# EAGLE board Thetis_RevG1_PCB (EAGLE 9.7.0)
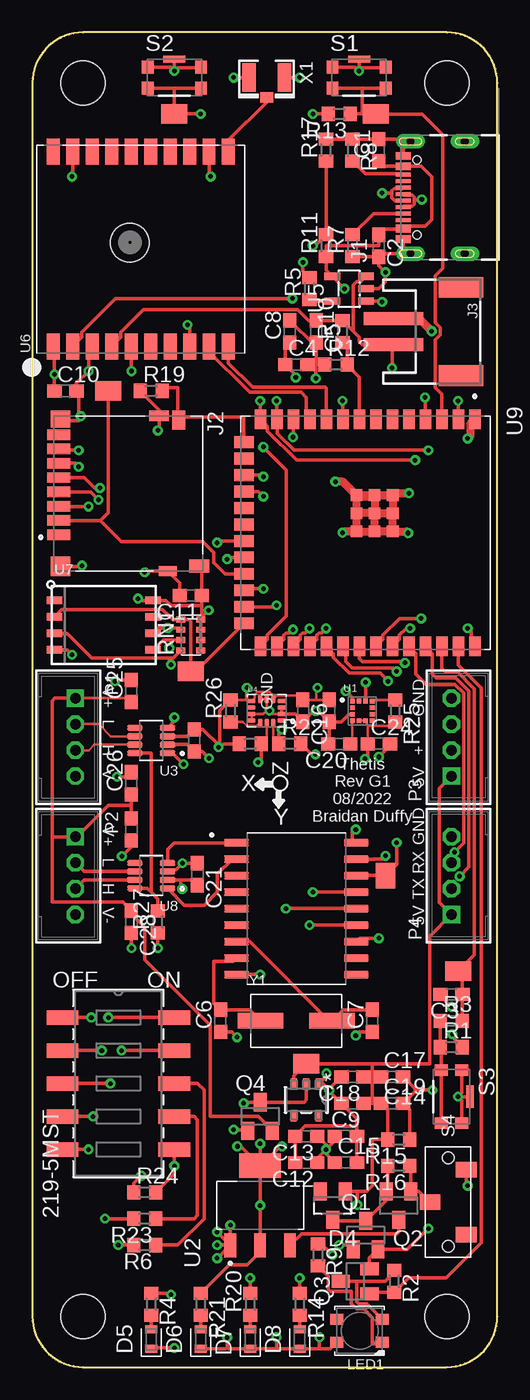
[diagram p0: board, top side]
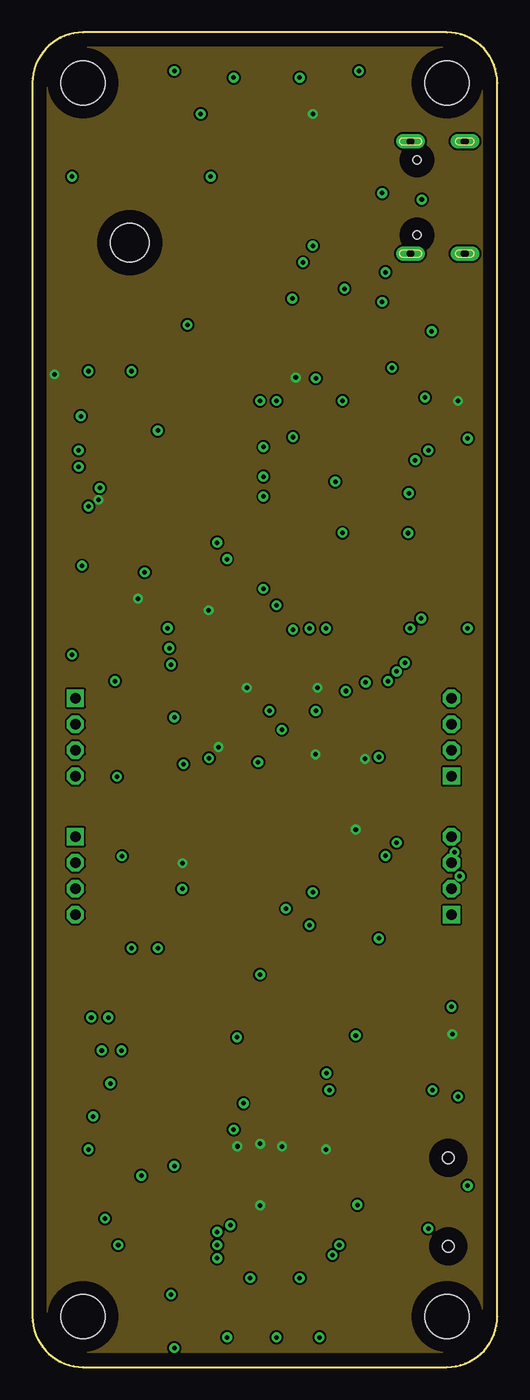
[diagram p1: board, inner layer PowerPlane]
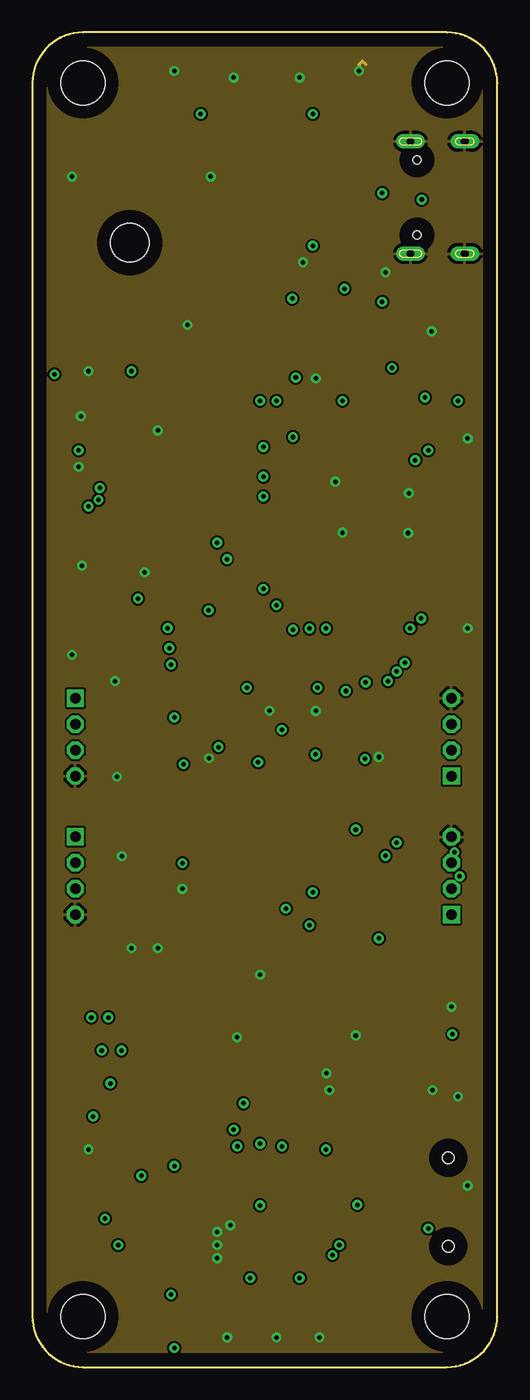
[diagram p2: board, inner layer GNDPlane]
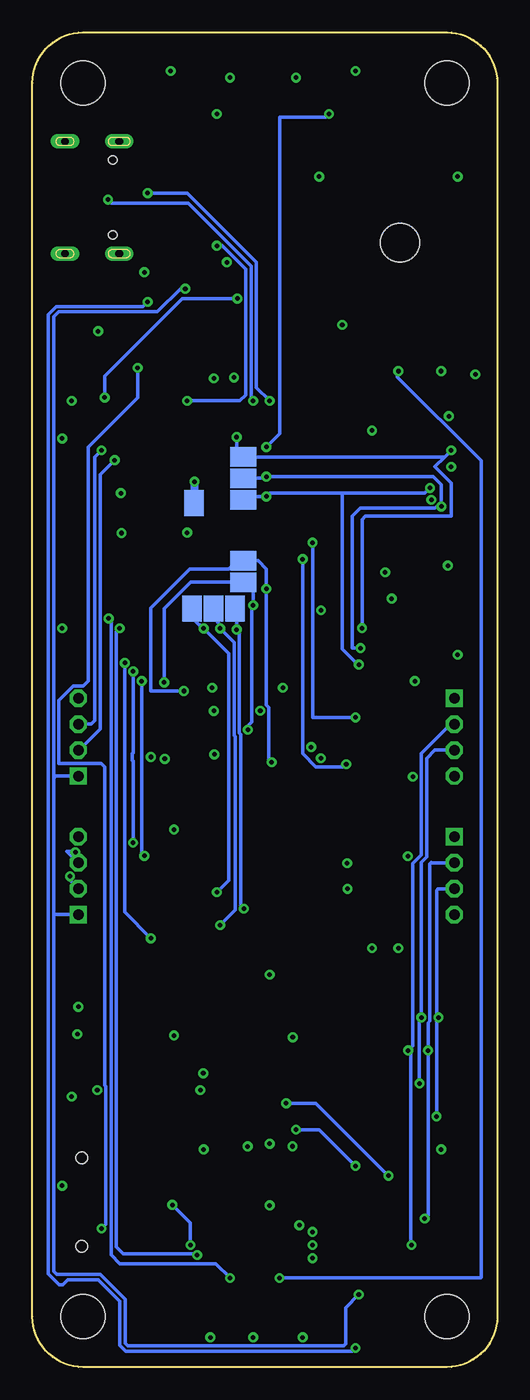
[diagram p3: board, bottom side, seen from below]

Size 35.79 x 102.79 mm. Coordinates in mm from the lower left corner, seen from the top.
Outline: 0,98.91 0,3.89 arc90 3.89,0 31.9,0 arc90 35.79,3.89 35.79,98.91 arc90 31.9,102.79 3.89,102.79 arc90 0,98.91
Copper layers (1+2*15+16): Top 0.035mm / dielectric 1.5mm / PowerPlane 0.035mm / dielectric 0.15mm / GNDPlane 0.035mm / dielectric 0.2mm / Bottom 0.035mm
Design rules "default *": minimum track width 6mil, minimum drill 0.35mm, track to track 6mil, track to pad 6mil, pad to pad 6mil, via to via 6mil, smd to smd 6mil, copper to edge 40mil, drill to drill 6mil, minimum pad ring 10mil, minimum via ring 8mil, stop-mask expansion 4mil, vias tented up to drill 0mil, thermal gap 10mil
Net classes: 0 default: width 0.178 mm
Holes 3.4 mm at 3.89,3.89 31.9,3.89 3.89,98.91 31.9,98.91
tKeepout: area 28.7,0.7 to 35.1,7.1; area 1,0.7 to 7.3,7.1; area 0.7,95.7 to 7.1,102.1; area 28.7,95.7 to 35.1,102.1

## Footprints (pad centres in the part's own frame; a part is rotated, then mirrored left to right if it is on the bottom)
C0603 = smd 1.1 x 1: 1 -0.85,0; 2 0.85,0
SOT23 = smd 1 x 1.4: 1 -0.95,-1.1; 2 0.95,-1.1; 3 0,1.1
LEDC1608X65N_RND-G = smd 0.612 x 0.912: A 0.75,0; C -0.75,0
LEDC1608X35N_FLAT-Y = smd 0.612 x 0.912: A 0.75,0; C -0.75,0
GCT_USB4105-GF-A = smd 0.6 x 1.15: A1_B12 -3.2,4.755; A4_B9 -2.4,4.755; B1_A12 3.2,4.755; B4_A9 2.4,4.755 | smd 0.3 x 1.15: A5 -1.25,4.755; A6 -0.25,4.755; A7 0.25,4.755; A8 1.25,4.755; B5 1.75,4.755; B6 0.75,4.755; B7 -0.75,4.755; B8 -1.75,4.755 | drill 0.6 pad 1.05 long: S1 -4.32,4.18; S4 4.32,4.18 | drill 0.6 pad 1 long: S2 -4.32,0; S3 4.32,0 | hole 0.65: 2.89,3.68; -2.89,3.68
HRS_DM3D-SF = smd 0.8 x 1.75: 1 3.2,0; 2 2.1,0; 3 1,0; 4 -0.1,0; 5 -1.2,0; 6 -2.3,0; 7 -3.4,0; 8 -4.5,0 | smd 1.3 x 1.5: S1 -5.7,0.125 | smd 1.5 x 1.5: S2 5.65,0.125 | smd 0.8 x 1.5: S3 -5.95,7.725 | smd 0.8 x 1.4: S4 6,8.375 | smd 1 x 1.55: SW-A 5.6,10.8 | smd 1.45 x 1: SW-B -5.625,9.225
JSTPH2 = smd 1 x 4.6: 1 -1,-3.7; 2 1,-3.7 | smd 1.6 x 3.4: NC1 -3.4,1.5; NC2 3.4,1.5
LED3535 = smd 1 x 0.85: 1 -1.75,0.875; 2 -1.75,-0.875; 3 1.75,-0.875; 4 1.75,0.875
B4B-PH-K = drill 0.813 square: 1 -3,0 | drill 0.813 octagon: 2 -1,0; 3 1,0; 4 3,0
R0603 = smd 1 x 1.1: 1 -0.85,0; 2 0.85,0
EXBV8V = smd 0.45 x 0.7: 1 -1.2,-0.775; 2 -0.4,-0.775; 3 0.4,-0.775; 4 1.2,-0.775; 5 1.2,0.775; 6 0.4,0.775; 7 -0.4,0.775; 8 -1.2,0.775
SW_KMR221GLFS = smd 0.9 x 1: 1 -2.05,0.8; 2 -2.05,-0.8; 3 2.05,-0.8; 4 2.05,0.8 | smd 1.7 x 0.55: 5 0,1.425
CL-SB-12A = smd 1.2 x 1.6: 1 -2.5,-1.4; 2 0,1.4; 3 2.5,-1.4 | hole 0.9: -3.4,0; 3.4,0
SW5_219SMT = smd 2.438 x 1.118: 1 -4.305,5.08; 2 -4.305,2.54; 3 -4.305,0; 4 -4.305,-2.54; 5 -4.305,-5.08; 6 4.305,-5.08; 7 4.305,-2.54; 8 4.305,0; 9 4.305,2.54; 10 4.305,5.08
PAD-1.5X2.0 = smd 1.5 x 2: P$1 0,0
XDCR_LIS3MDLTR = smd 0.375 x 0.35: 1 -0.762,0.75; 2 -0.762,0.25; 3 -0.762,-0.25; 4 -0.762,-0.75; 7 0.762,-0.75; 8 0.762,-0.25; 9 0.762,0.25; 10 0.762,0.75 | smd 0.35 x 0.375: 5 -0.25,-0.762; 6 0.25,-0.762; 11 0.25,0.762; 12 -0.25,0.762
SOT230P700X180-4N = smd 1.86 x 0.9: 1 -3.075,2.3; 2 -3.075,0; 3 -3.075,-2.3 | smd 1.86 x 3.19: 4 3.075,0
SOT65P280X145-8N = smd 1.21 x 0.48: 1 -1.255,0.975; 2 -1.255,0.325; 3 -1.255,-0.325; 4 -1.255,-0.975; 5 1.255,-0.975; 6 1.255,-0.325; 7 1.255,0.325; 8 1.255,0.975
PQFN50P300X250X97-14N = smd 0.61 x 0.35: 1 -1.16,0.75; 2 -1.16,0.25; 3 -1.16,-0.25; 4 -1.16,-0.75; 8 1.16,-0.75; 9 1.16,-0.25; 10 1.16,0.25; 11 1.16,0.75 | smd 0.35 x 0.61: 5 -0.5,-0.91; 6 0,-0.91; 7 0.5,-0.91; 12 0.5,0.91; 13 0,0.91; 14 -0.5,0.91
SOT23-5L = smd 0.55 x 1.2: 1 -0.95,-1.3; 2 0,-1.3; 3 0.95,-1.3; 4 0.95,1.3; 5 -0.95,1.3
FGPMMOPA6H = smd 2 x 1: P$1 -7.5,6.75; P$2 -7.5,5.25; P$3 -7.5,3.75; P$4 -7.5,2.25; P$5 -7.5,0.75; P$6 -7.5,-0.75; P$7 -7.5,-2.25; P$8 -7.5,-3.75; P$9 -7.5,-5.25; P$10 -7.5,-6.75; P$11 7.5,-6.75; P$12 7.5,-5.25; P$13 7.5,-3.75; P$14 7.5,-2.25; P$15 7.5,-0.75; P$16 7.5,0.75; P$17 7.5,2.25; P$18 7.5,3.75; P$19 7.5,5.25; P$20 7.5,6.75 | hole 3: 0.5,0.85
LGA8_8X6 = smd 1.2 x 0.6: 1 -3.8,1.905; 2 -3.8,0.635; 3 -3.8,-0.635; 4 -3.8,-1.905; 5 3.8,-1.905; 6 3.8,-0.635; 7 3.8,0.635; 8 3.8,1.905
XCVR_ESP32-S2-SOLO-U-N4R2 = smd 1.5 x 0.9: 1 -8.75,8.41; 2 -8.75,7.14; 3 -8.75,5.87; 4 -8.75,4.6; 5 -8.75,3.33; 6 -8.75,2.06; 7 -8.75,0.79; 8 -8.75,-0.48; 9 -8.75,-1.75; 10 -8.75,-3.02; 11 -8.75,-4.29; 12 -8.75,-5.56; 13 -8.75,-6.83; 14 -8.75,-8.1; 27 8.75,-8.1; 28 8.75,-6.83; 29 8.75,-5.56; 30 8.75,-4.29; 31 8.75,-3.02; 32 8.75,-1.75; 33 8.75,-0.48; 34 8.75,0.79; 35 8.75,2.06; 36 8.75,3.33; 37 8.75,4.6; 38 8.75,5.87; 39 8.75,7.14; 40 8.75,8.41 | smd 0.9 x 1.5: 15 -6.985,-9.35; 16 -5.715,-9.35; 17 -4.445,-9.35; 18 -3.175,-9.35; 19 -1.905,-9.35; 20 -0.635,-9.35; 21 0.635,-9.35; 22 1.905,-9.35; 23 3.175,-9.35; 24 4.445,-9.35; 25 5.715,-9.35; 26 6.985,-9.35 | smd 0.9 x 0.9: 41_1 -2.9,2.09; 41_2 -1.5,2.09; 41_3 -0.1,2.09; 41_4 -2.9,0.69; 41_5 -1.5,0.69; 41_6 -0.1,0.69; 41_7 -2.9,-0.71; 41_8 -1.5,-0.71; 41_9 -0.1,-0.71
SOT_50WR-7_DIO-L = smd 0.8 x 0.457: 1 -1.251,0.95; 2 -1.251,0; 3 -1.251,-0.95; 4 1.251,-0.95; 5 1.251,0.95
SOIC127P1030X265-18N = smd 1.91 x 0.6: 1 -4.61,5.08; 2 -4.61,3.81; 3 -4.61,2.54; 4 -4.61,1.27; 5 -4.61,0; 6 -4.61,-1.27; 7 -4.61,-2.54; 8 -4.61,-3.81; 9 -4.61,-5.08; 10 4.61,-5.08; 11 4.61,-3.81; 12 4.61,-2.54; 13 4.61,-1.27; 14 4.61,0; 15 4.61,1.27; 16 4.61,2.54; 17 4.61,3.81; 18 4.61,5.08
U.FL = smd 2.2 x 1.05: 1 0,1.375; 2 0,-1.375 | smd 0.8 x 1: 3 1.525,0
XTAL_ECS-160-20-3X-TR = smd 3.5 x 1.2: 1 -2.75,0; 2 2.75,0

## Placement (x,y rotation side)
C1  10 uF  [C0603]  26.67,93.73 90 top
C2  10 uF  [C0603]  26.67,86.36 270 top
C3  1 uF  [C0603]  32.26,28.7 180 top
C4  0.1 uF  [C0603]  20.32,77.22 0 top
C5  10 uF  [C0603]  21.84,79.76 270 top
C6  22 pF  [C0603]  14.48,26.67 90 top
C7  22 pF  [C0603]  26.16,26.67 90 top
C8  0.1 uF  [C0603]  19.81,79.76 90 top
C9  1 uF  [C0603]  24.64,20.32 180 top
C10  1 uF  [C0603]  2.54,75.18 0 top
C11  1 uF  [C0603]  12.19,59.44 180 top
C12  1 uF  [C0603]  21.08,15.75 180 top
C13  1 uF  [C0603]  21.08,17.78 180 top
C14  1 uF  [C0603]  24.13,17.78 0 top
C15  1 uF  [C0603]  24.13,15.75 0 top
C16  0.1 uF  [C0603]  20.83,50.55 270 top
C17  1 uF  [C0603]  27.69,22.35 0 top
C18  1 uF  [C0603]  24.64,22.35 180 top
C19  1 uF  [C0603]  27.69,20.32 0 top
C20  0.1 uF  [C0603]  23.62,48.01 180 top
C21  0.1 uF  [C0603]  12.7,37.96 270 top
C22  0.1 uF  [C0603]  12.45,48.26 270 top
C23  0.1 uF  [C0603]  22.86,50.55 270 top
C24  0.1 uF  [C0603]  26.67,48.01 0 top
C25  1 uF  [C0603]  7.62,52.07 90 top
C26  1 uF  [C0603]  7.62,44.96 90 top
C27  1 uF  [C0603]  7.62,41.4 270 top
C28  1 uF  [C0603]  7.62,34.29 270 top
D4  BAT400  [SOT23]  23.11,12.45 180 top
D5  LED_GREEN  [LEDC1608X65N_RND-G]  9.14,2.15 90 top
D6  LED_GREEN  [LEDC1608X65N_RND-G]  12.95,2.15 90 top
D7  LED_YELLOW  [LEDC1608X35N_FLAT-Y]  16.76,2.15 90 top
D8  LED_GREEN  [LEDC1608X65N_RND-G]  20.57,2.15 90 top
J1  USB4105-GF-A  [GCT_USB4105-GF-A]  33.29,90.08 90 top
J2  DM3D-SF  [HRS_DM3D-SF]  2.03,67.31 270 top
J3  1S LiPo  [JSTPH2]  31.5,79.76 270 top
LED1  WS2812B3535  [LED3535]  25.19,2.79 180 top
P1  CAN0  [B4B-PH-K]  3.3,48.51 270 top
P2  CAN1  [B4B-PH-K]  3.3,37.85 270 top
P3  USB  [B4B-PH-K]  32.26,48.51 90 top
P4  UART  [B4B-PH-K]  32.26,37.85 90 top
Q1  AOSS21311C  [SOT23]  25.65,10.16 0 top
Q2  AOSS21311C  [SOT23]  28.19,12.45 180 top
Q3  AOSS21311C  [SOT23]  24.84,6.6 90 top
Q4  AOSS21311C  [SOT23]  17.53,19.3 0 top
R1  10k  [R0603]  32.26,24.64 0 top
R2  100k  [R0603]  27.85,6.6 270 top
R3  10k  [R0603]  32.26,26.67 0 top
R4  1k  [R0603]  9.14,4.83 270 top
R5  2k  [R0603]  21.34,83.06 90 top
R6  120  [R0603]  8.64,9.4 180 top
R7  5k1  [R0603]  24.64,86.36 90 top
R8  5k1  [R0603]  24.64,93.73 270 top
R9  480  [R0603]  21.98,8.64 270 top
R10  1M  [R0603]  23.88,79.76 90 top
R11  100k  [R0603]  22.61,86.36 90 top
R12  1M  [R0603]  23.37,77.22 0 top
R13  10k  [R0603]  23.62,96.52 180 top
R14  1k  [R0603]  20.57,4.83 270 top
R15  100k  [R0603]  28.19,17.53 180 top
R16  100k  [R0603]  28.19,15.49 180 top
R17  200k  [R0603]  22.61,93.73 90 top
R18  2.7k  [R0603]  16.76,48.01 180 top
R19  10k  [R0603]  9.14,75.18 0 top
R20  1k  [R0603]  16.76,4.83 90 top
R21  1k  [R0603]  12.95,4.83 270 top
R22  2.7k  [R0603]  19.81,48.01 0 top
R23  120  [R0603]  8.64,11.43 180 top
R24  100k  [R0603]  8.64,13.46 0 top
R25  10k  [R0603]  27.94,50.55 270 top
R26  10k  [R0603]  15.24,50.55 90 top
R27  10k  [R0603]  9.65,34.29 90 top
RN1  10k  [EXBV8V]  12.19,56.39 90 top
S1  KMR221GLFS  [SW_KMR221GLFS]  25.15,99.31 0 top
S2  KMR221GLFS  [SW_KMR221GLFS]  10.92,99.31 0 top
S3  KMR221GLFS  [SW_KMR221GLFS]  32.26,20.83 270 top
S4  CL-SB-12X  [CL-SB-12A]  32,12.7 90 top
SW1  219-5MST  [SW5_219SMT]  6.62,21.84 0 top
TP7  [PAD-1.5X2.0]  19.56,60.45 90 bottom
TP8  [PAD-1.5X2.0]  19.56,62.1 90 bottom
TP9  [PAD-1.5X2.0]  19.56,68.45 90 bottom
TP10  [PAD-1.5X2.0]  19.56,66.8 90 bottom
TP11  [PAD-1.5X2.0]  19.56,70.11 90 bottom
TP12  [PAD-1.5X2.0]  5.84,75.18 90 top
TP14  [PAD-1.5X2.0]  23.37,66.55 0 bottom
TP18  [PAD-1.5X2.0]  12.19,53.59 90 top
TP19  [PAD-1.5X2.0]  10.92,96.52 90 top
TP20  [PAD-1.5X2.0]  26.42,96.52 90 top
TP21  [PAD-1.5X2.0]  27.18,37.85 180 top
TP22  [PAD-1.5X2.0]  23.5,58.42 0 bottom
TP23  [PAD-1.5X2.0]  20.19,58.42 0 bottom
TP24  [PAD-1.5X2.0]  21.84,58.42 0 bottom
TP27  [PAD-1.5X2.0]  21.08,23.37 270 top
TP28  [PAD-1.5X2.0]  32.77,30.48 270 top
U1  LIS3MDLTR  [XDCR_LIS3MDLTR]  25.4,50.55 0 top
U2  AZ1117H-3.3TRE1  [SOT230P700X180-4N]  17.53,12.45 90 top
U3  MAX3051EKA  [SOT65P280X145-8N]  9.14,48.26 180 top
U4  LSM6DSO32TR  [PQFN50P300X250X97-14N]  18.03,50.55 180 top
U5  MCP73831/OT  [SOT23-5L]  24.38,83.06 90 top
U6  [FGPMMOPA6H]  8.34,86.11 90 top
U7  [LGA8_8X6]  5.49,57.15 0 top
U8  MAX3051EKA  [SOT65P280X145-8N]  9.14,37.85 180 top
U9  ESP32-S2-SOLO-U-N4R2  [XCVR_ESP32-S2-SOLO-U-N4R2]  25.65,64.26 270 top
U10  AP7380  [SOT_50WR-7_DIO-L]  21.08,20.57 270 top
U11  MCP2515-I/SO  [SOIC127P1030X265-18N]  20.32,35.31 0 top
X1  [U.FL]  18.03,99.31 270 top
Y1  16 MHz  [XTAL_ECS-160-20-3X-TR]  20.32,26.67 0 top

## Library data of the parts
C1-C28 = rcl; SPICEPREFIX: C
D4 = diode
D5 D6 D8 = LED; CATEGORY: LED; COLOR: GREEN; DESCRIPTION: CHIP LED ROUND; SUB-CATEGORY: CHIP; TYPE: ROUND_TOP
D7 = LED; CATEGORY: LED; COLOR: YELLOW; DESCRIPTION: CHIP LED FLAT; SUB-CATEGORY: CHIP; TYPE: FLAT_TOP
J1 = USB4105-GF-A; AVAILABILITY: In Stock; DESCRIPTION: USB-C (USB TYPE-C) USB 2.0 Receptacle Connector 24 (16+8 Dummy) Position Surface Mount, Right Angle; Through Hole; MF: GCT; MP: USB4105-GF-A; PACKAGE: None; PRICE: None; PURCHASE-URL: https://pricing.snapeda.com/search/part/USB4105-GF-A/?ref=eda
J2 = UTL-Lib; MANUFACTURER: Hirose; MAXIMUM_PACKAGE_HEIGHT: 1.55mm; PARTREV: 2017.1; STANDARD: Manufacturer Recommendations
J3 LED1 U7 U11 = UTL-Lib
P1-P4 = con-jst-ph
Q1-Q4 = Transistor; CATEGORY: Transistor; DESCRIPTION: MOSFET P-CH 50V 130MA SOT-23; DRAIN_CURRENT: 130mA; MANUFACTURER: ON Semiconductor; MPN: BSS84; OPERATING_TEMP: -55°C ~ 150°C; PART_STATUS: Active; ROHS_COMPLIANT: Yes; SUB-CATEGORY: MOSFET; THERMALLOSS: 360mW; TYPE: P-Channel
R1-R27 = rcl; SPICEPREFIX: R
RN1 = resistor-dil-Poseidon-Edit; OC_FARNELL: unknown; OC_NEWARK: unknown
S1-S3 = KMR221GLFS; MANUFACTURER: CnK
S4 = switches; DIGIKEY: 563-1314-1-ND
SW1 = UTL-Lib; COPYRIGHT: Copyright (C) 2022 Ultra Librarian. All rights reserved.; DIGI-KEY_PART_NUMBER_1: CT2195MST-ND; MANUFACTURER_PART_NUMBER: 219-5MST; MFR_NAME: CTS Components
TP7-TP12 TP14 TP18-TP24 TP27 TP28 = microbuilder
U1 = UTL-Lib; AVAILABILITY: Unavailable; DESCRIPTION: LIS3MDL Series 3 Axis ±2/±8/±12/±16 g 3.6V High Performance Magnetometer LGA-12; MAXIMUM_PACKAGE_HEIGHT: 1mm; MF: STMicroelectronics; MP: LIS3MDLTR; PACKAGE: VFLGA-12 STMicroelectronics; PARTREV: 6; PRICE: None; STANDARD: Manufacturer Recommendation
U2 = AZ1117EH-5.0TRG1; ARROW_ELECTRONICS-PURCHASE-URL: https://snapeda.com/shop?store=Arrow+Electronics&id=482930; AVAILABILITY: Good; DESCRIPTION: Linear Voltage Regulator IC 1 Output 1A SOT-223; DIGIKEY-PURCHASE-URL: https://snapeda.com/shop?store=DigiKey&id=482930; MF: Diodes Inc.; MOUSER-PURCHASE-URL: https://snapeda.com/shop?store=Mouser&id=482930; MP: AZ1117EH-5.0TRG1; PACKAGE: SOT-223 Diodes Inc.; PRICE: None
U3 U8 = UTL-Lib; DESCRIPTION: 1/1 Transceiver Half CANbus SOT-23-8; DIGI-KEY_PART_NUMBER: MAX3051EKA+TTR-ND; MF: Maxim Integrated; MP: MAX3051EKA+T; PACKAGE: SOT-23-8 Maxim; PURCHASE-URL: https://pricing.snapeda.com/search/part/MAX3051EKA+T/?ref=eda
U4 = UTL-Lib; MANUFACTURER: TDK Corporation; PARTREV: 0.4; STANDARD: IPC 7351B
U5 U6 X1 = adafruit - EVE Edit
U9 = UTL-Lib; MANUFACTURER: Espressif Systems; MAXIMUM_PACKAGE_HEIGHT: 3.35 mm; PARTREV: 1.4; SNAPEDA_PN: ESP32-S2-SOLO-U-N4R2; STANDARD: Manufacturer Recommendations
U10 = UTL-Lib; COPYRIGHT: Copyright (C) 2022 Ultra Librarian. All rights reserved.; DIGI-KEY_PART_NUMBER_1: AP7380-50WR-7DITR-ND; DIGI-KEY_PART_NUMBER_2: AP7380-50WR-7DICT-ND; DIGI-KEY_PART_NUMBER_3: AP7380-50WR-7DIDKR-ND; MANUFACTURER_PART_NUMBER: AP7380-50WR-7; MFR_NAME: Diodes Inc
Y1 = UTL-Lib; MANUFACTURER: ECS INC.; PARTREV: 2017; STANDARD: Manufacturer recommendations

## Nets
3.3V: C4.1 C8.1 C10.1 C11.1 C12.1 C13.1 C14.1 C15.1 C16.1 C21.1 C22.1 C23.1 C24.1 J2.4 J2.SW-A R1.2 R13.2 R18.2 R21.1 R22.2 R25.2 R26.2 RN1.1 RN1.2 RN1.3 RN1.4 U1.5 U1.6 U2.2 U2.4 U3.3 U4.5 U4.8 U6.P$1 U7.8 U8.3 U9.2 U11.18
!CAN_CS: TP21.P$1 U9.32 U11.16
!CAN_EN: R27.2 U3.8 U8.8
!CAN_INT: U9.33 U11.12
!CAN_RST: U9.31 U11.17
!EXT_PWR_EN: Q4.1 R24.2 SW1.6
!GPS_RST: U6.P$2 U9.4
!LOG_EN: C3.1 R3.2 TP28.P$1 U9.38
!NEO_EN: Q3.1 R2.2 U9.39
!RST: R13.1 S1.2 S1.3 TP20.P$1 U9.3
ACT_LED: R14.1 U9.34
BATT_MON: R10.1 R12.2 U9.8
BOOT: S2.2 S2.3 TP19.P$1 U9.27
CAN0_H: P1.3 SW1.3 SW1.10 U3.7
CAN0_L: P1.2 R6.2 SW1.9 U3.6
CAN0_RXD: U3.1 U9.22
CAN0_TXD: U3.4 U9.21
CAN1_H: P2.3 SW1.1 SW1.4 U8.7
CAN1_L: P2.2 R23.2 SW1.2 U8.6
CAN1_RXD: U8.1 U11.2
CAN1_TXD: U8.4 U11.1
CAN_MISO: TP22.P$1 U9.30 U11.15
CAN_MOSI: TP23.P$1 U9.28 U11.14
CAN_SCK: TP24.P$1 U9.29 U11.13
CC1: J1.A5 R7.2
CC2: J1.B5 R8.2
ESP_RX0: P4.3 U9.36
ESP_RX1: U6.P$9 U9.11
ESP_TX0: P4.2 U9.37
ESP_TX1: U6.P$10 U9.10
GND: C1.2 C2.2 C3.2 C4.2 C5.2 C6.1 C7.1 C8.2 C9.2 C10.2 C11.2 C12.2 C13.2 C14.2 C15.2 C16.2 C17.2 C18.2 C19.2 C20.2 C21.2 C22.2 C23.2 C24.2 C25.2 C26.2 C27.2 C28.2 D6.C D7.C D8.C J1.A1_B12 J1.B1_A12 J1.S1 J1.S2 J1.S3 J1.S4 J2.6 J2.S1 J2.S2 J2.S3 J2.S4 J3.1 LED1.4 P1.4 P2.4 P3.4 P4.4 R5.2 R7.1 R8.1 R12.1 R15.1 R17.2 R19.1 R27.1 S1.1 S1.4 S1.5 S2.1 S2.4 S2.5 S3.1 S3.4 S3.5 S4.3 SW1.5 TP14.P$1 U1.3 U2.1 U3.2 U4.2 U4.3 U4.6 U4.7 U4.10 U4.11 U5.2 U6.P$3 U6.P$8 U6.P$12 U6.P$19 U7.4 U8.2 U9.1 U9.40 U9.41_1 U9.41_2 U9.41_3 U9.41_4 U9.41_5 U9.41_6 U9.41_7 U9.41_8 U9.41_9 U10.1 U11.9 X1.1 X1.2
GPS_FIX: R20.2 U6.P$5
MISO: J2.7 RN1.6 TP11.P$1 U7.6 U9.12
MOSI: J2.3 RN1.7 TP9.P$1 U7.5 U9.17
N$1: Q2.1 R16.1 S4.2
N$2: D7.A R20.1
N$3: D8.A R14.2
N$4: R1.1 R3.1 S3.2 S3.3
N$5: LED1.2 Q3.3 R2.1
N$6: Q2.3 U2.3
N$7: C20.1 U1.4
N$8: LED1.1 R9.2
N$10: U6.P$11 X1.3
N$11: R6.1 SW1.8
N$12: R26.1 U4.12
N$13: D4.3 Q1.3 Q2.2 R16.2
N$14: R23.1 SW1.7
N$15: R25.1 U1.10
N$16: Q4.3 R24.1 U10.2
N$20: D5.A R4.2
N$21: D5.C U5.1
N$22: R5.1 U5.5
N$24: D6.A R21.2
NEO_DATA: R9.1 U9.35
OSC1: C6.2 U11.8 Y1.1
OSC2: C7.2 U11.7 Y1.2
SCK: J2.5 RN1.8 TP10.P$1 U7.3 U9.18
SCL: R18.1 TP8.P$1 U1.1 U4.13 U9.24
SD_CD: J2.SW-B R19.2 U9.15
SD_CS: J2.2 TP12.P$1 U9.23
SDA: R22.1 TP7.P$1 U1.11 U4.14 U9.25
USB_DN: J1.A7 J1.B7 P3.3 U9.13
USB_DP: J1.A6 J1.B6 P3.2 U9.14
USB_MON: R11.2 R17.1 U9.9
V_BATT: C5.1 J3.2 Q1.2 Q3.2 R10.2 U5.3 U6.P$4
V_USB: C1.1 C2.1 C9.1 C17.1 C18.1 C19.1 D4.1 J1.A4_B9 J1.B4_A9 P3.1 P4.1 Q1.1 R4.1 R11.1 R15.2 TP27.P$1 U5.4 U10.3
VIN: C25.1 C26.1 C27.1 C28.1 P1.1 P2.1 Q4.2
XTSD_CS: RN1.5 TP18.P$1 U7.2 U9.26

## Tracks (layer width: path | path; a pad name or v marks a point on that pad's centre or on a via)
3.3V  (via drill 0.35)
  Top 0.178: 21.84,51.4 C16.1 20.51,51.71 18.84,51.71 18.58,51.46 U4.5 18.45,51.54 18.45,51.81 18.26,52 17.31,52 17.12,51.81 17.12,51.54 U4.8 16.77,51.4 16.51,51.4 R26.2 | 21.84,51.4 C23.1 | C24.1 25.82,49.44 | 25.82,49.44 25.73,49.52 25.73,49.7 U1.6 U1.5 | 25.82,49.44 25.88,49.38 27.62,49.38 R25.2 | 21.84,51.4 21.84,51.92 21.95,52.02 v21.95,52.32
  Top 0.254: 13.04,58.66 C11.1 13.04,61.5 J2.SW-A | 13.04,58.66 13.04,57.66 RN1.4 RN1.3 RN1.2 | RN1.2 RN1.1 | v13.57,58.29 12.97,57.69 RN1.2 | v17.53,17.2 U2.4 | C12.1 21.93,16.09 v22.61,16.76 | C13.1 22.61,17.11 v22.61,16.76 | C14.1 23.28,17.44 v22.61,16.76 | C15.1 22.61,16.42 v22.61,16.76 | U2.4 17.62,15.52 19.1,16.99 v19.22,16.99 | U2.4 16.05,17 v15.77,17 | U2.4 v17.53,12.45 U2.2 17.78,9.12 16.54,7.87 15.15,7.87 R21.1 | R1.2 32.39,25.36 32.39,25.59 v32.33,25.64 | v24.89,41.4 24.64,41.4 24.64,40.68 U11.18 | C8.1 19.47,78.56 C4.1 20.27,76.41 v20.27,76.22 | C10.1 v1.69,76.45 1.69,78.51 U6.P$1 | R13.2 v21.59,96.52 | R22.2 21.42,47.24 21.73,47.24 v21.79,47.19 | R18.2 14.73,48.01 14.48,47.75 | 14.41,47.82 13.12,49.11 C22.1 11.92,48.59 U3.3 | 14.41,47.82 14.41,50.57 R26.2 | 14.41,47.82 14.48,47.75 | 16.51,51.4 v16.51,52.32 | C24.1 25.82,47.05 v25.6,46.84 | v8.13,59.18 8.25,59.05 U7.8 10.28,59.05 10.68,58.66 13.04,58.66 | U9.2 32.79,74.39 v32.77,74.42 | J2.4 4.47,67.41 v5.08,66.8 | U8.3 10.53,38.3 11.05,38.3 v11.55,38.81 C21.1 | 14.48,47.75 v14.33,47.75
  pour PowerPlane: -2.2,-5.25 38.52,-5.25 38.52,108.62 -2.2,108.62
!CAN_CS  (via drill 0.35)
  Top 0.254: U11.16 TP21.P$1 28.04,38.71 v28.04,40.39 | U9.32 24.13,55.29 24.13,54.36 24.64,53.85 27.31,53.85 27.32,53.84 27.78,53.84 v28.04,53.58
  Bottom 0.254: v28.04,40.39 28.04,46.67 28.09,46.72 28.09,47.26 28.04,47.31 v28.04,53.58
!CAN_EN
  Top 0.254: U8.8 8.85,36.87 9.14,36.58 | 9.14,36.58 9.65,36.07 R27.2 | U3.8 9.1,47.28 9.14,47.24 9.14,36.58
!CAN_INT  (via drill 0.35)
  Top 0.254: U9.33 25.17,54.58 25.4,54.36 28.55,54.36 v28.67,54.23 | v26.67,33.02 25.18,33.02 U11.12
  Bottom 0.254: v26.67,33.02 28.7,35.05 28.7,54.2 v28.67,54.23
!CAN_RST  (via drill 0.35)
  Top 0.254: U9.31 23.17,54.97 23.17,54.65 24.38,53.44 26.77,53.44 v27.38,52.83 | v27.18,39.38 26.93,39.12 26.31,39.12 26.3,39.12 U11.17
  Bottom 0.254: v27.38,52.83 27.38,39.58 v27.18,39.38
!EXT_PWR_EN  (via drill 0.35)
  Top 0.254: Q4.1 16.49,18.29 v15.49,18.29 | SW1.6 v10.92,15.49 10.92,14.9 R24.2
  Bottom 0.254: v15.49,18.29 13.72,18.29 v10.92,15.49
!GPS_RST  (via drill 0.35)
  Top 0.254: U6.P$2 3.81,79.33 3.81,79.72 6.39,82.3 v20.01,82.3 | v30.23,74.68 30.25,74.65 U9.4
  Bottom 0.254: v30.23,74.68 30.23,76.32 24.25,82.3 v20.01,82.3
!LOG_EN
  Top 0.254: U9.38 31.52,53.82 31.75,53.59 32.66,53.59 34.01,52.24 34.01,31.73 TP28.P$1 33.11,30.14 C3.1 R3.2
!NEO_EN
  Top 0.254: U9.39 32.79,54.07 34.57,52.3 34.57,9.57 31.86,6.86 28.96,6.86 R2.2 26.04,5.75 Q3.1
!RST
  Top 0.254: R13.1 25.4,96.52 | 25.4,96.52 TP20.P$1 26.43,96.5 30.01,96.5 31.58,94.93 31.58,84.64 31.02,84.07 31.02,80.43 31.39,80.06 31.39,79.51 31.02,79.14 31.02,75.44 31.52,74.93 U9.3 | S1.2 25.4,98.51 | 25.4,98.51 S1.3 | 25.4,96.52 25.4,98.51
ACT_LED  (via drill 0.35)
  Top 0.254: U9.34 26.98,56.05 26.98,56.38 28.27,57.66 v29.92,57.66 | v20.57,6.86 R14.1
  Bottom 0.254: v20.57,6.86 21.69,7.97 29.05,7.97 29.74,8.65 29.74,57.47 v29.92,57.66
BATT_MON
  Top 0.254: R10.1 24.22,78.56 R12.2 25.17,76.26 U9.8
BOOT  (via drill 0.35)
  Top 0.254: S2.3 10.92,98.51 | 10.92,98.51 S2.2 | 10.92,98.51 TP19.P$1 v12.95,96.52 | v17.78,70.87 19.56,69.09 19.56,57.84 18.09,56.38 18.09,56.05 U9.27
  Bottom 0.254: v12.95,96.52 13.21,96.27 16.76,96.27 16.76,71.88 v17.78,70.87
CAN0_H  (via drill 0.35)
  Top 0.178: U3.7 4.75,47.94 4.32,47.5 3.32,47.5 P1.3
  Top 0.254: v5.84,26.92 SW1.10 | SW1.3 v5.99,21.84
  Bottom 0.254: P1.3 4.81,47.51 5.44,46.89 5.44,39.28 5.84,38.88 v5.84,26.92 5.99,26.77 5.99,21.89 v5.99,21.84
CAN0_L  (via drill 0.35)
  Top 0.178: P1.2 5.1,49.51 6.02,48.59 U3.6
  Top 0.254: v6.86,24.38 SW1.9 | v6.6,9.4 R6.2
  Bottom 0.254: P1.2 3.57,49.51 5.84,47.24 5.84,39.45 6.5,38.8 6.5,24.74 v6.86,24.38 6.65,24.18 6.65,9.44 v6.6,9.4
CAN0_RXD  (via drill 0.35)
  Top 0.254: U9.22 15.11,62.36 v14.99,62.23 | U3.1 10.77,47.28 v11.63,46.43
  Bottom 0.254: v14.99,62.23 14.99,47.24 13.97,46.23 11.82,46.23 v11.63,46.43
CAN0_TXD  (via drill 0.35)
  Top 0.254: U9.21 14.35,63.63 v14.22,63.5 | U3.4 10.92,49.76 v10.92,50.04
  Bottom 0.254: v14.22,63.5 14.22,50.04 v10.92,50.04
CAN1_H  (via drill 0.35)
  Top 0.254: P2.3 3.98,37.52 U8.7 | SW1.1 v4.53,26.92 | v4.68,19.3 SW1.4
  Bottom 0.254: P2.3 3.32,36.83 4.57,36.83 4.68,36.73 4.68,26.92 | 4.68,26.92 v4.53,26.92 | 4.68,26.92 v4.68,19.3
CAN1_L  (via drill 0.35)
  Top 0.254: U8.6 3.98,38.17 P2.2 | v5.33,24.38 SW1.2 | R23.2 v5.59,11.43
  Bottom 0.254: P2.2 5.06,38.85 5.08,38.86 5.18,38.76 5.18,26.65 5.33,26.5 v5.33,24.38 5.33,11.68 v5.59,11.43
CAN1_RXD
  Top 0.254: U8.1 10.4,36.84 11.68,35.56 13.21,35.56 14.24,36.59 14.24,37.98 15.37,39.12 U11.2
CAN1_TXD
  Top 0.254: U8.4 10.4,39.86 10.92,40.39 U11.1
CAN_MISO  (via drill 0.35)
  Top 0.254: U11.15 v21.6,36.58 v21.59,36.57 | U9.30 21.9,56.05 21.9,56.38 22.07,56.54 22.26,56.54 v22.61,56.89
  Bottom 0.254: TP22.P$1 23.5,57.67 22.96,57.14 22.86,57.14 v22.61,56.89 20.68,54.96 20.68,37.48 v21.59,36.57
CAN_MOSI  (via drill 0.35)
  Top 0.254: U9.28 19.36,56.05 19.36,56.38 19.53,56.54 19.81,56.54 v20.07,56.79 | v19.51,35.31 U11.14
  Bottom 0.254: TP23.P$1 20.07,58.29 v20.07,56.79 19.86,56.59 19.86,48.82 19.76,48.72 19.76,35.55 v19.51,35.31
CAN_SCK  (via drill 0.35)
  Top 0.254: U11.13 v21.34,34.04 | U9.29 20.63,56.05 20.63,56.38 20.8,56.54 20.99,56.54 v21.34,56.89
  Bottom 0.254: TP24.P$1 21.84,57.67 21.34,57.16 v21.34,56.89 20.27,55.82 20.27,48.65 20.17,48.55 20.17,35.2 v21.34,34.04
CC1
  Top 0.254: R7.2 26.26,88.83 J1.A5
CC2
  Top 0.254: R8.2 25.61,91.9 28.46,91.9 J1.B5
ESP_RX0  (via drill 0.35)
  Top 0.254: U9.36 29.52,54.97 29.52,53.38 30.32,52.58 32.52,52.58 33.2,51.9 33.2,40.36 v32.49,39.66
  Bottom 0.254: P4.3 33.13,39.72 32.84,39.72 32.77,39.66 v32.49,39.66
ESP_RX1
  Top 0.254: U9.11 21.08,73.29 21.08,74.68 20.68,75.08 16.72,75.08 13.39,78.41 U6.P$9
ESP_TX0  (via drill 0.35)
  Top 0.254: U9.37 30.79,54.97 30.79,53.38 31.09,53.09 32.59,53.09 33.6,52.07 33.6,38.51 v32.9,37.8
  Bottom 0.254: v32.9,37.8 32.9,37.48 P4.2
ESP_TX1
  Top 0.254: U6.P$10 15.09,77.34 16.94,75.49 22.56,75.49 22.63,75.41 U9.10
GND  (via drill 0.35)
  Top 0.178: U4.7 U4.6 18.03,50.55 | U4.11 U4.10 17.78,50.3 18.03,50.55 | U4.2 18.28,50.3 18.03,50.55 | 18.03,50.55 v18.25,50.55
  Top 0.254: v22.86,21.34 22.37,21.82 U10.1 22.61,22.4 22.61,22.6 v22.64,22.63 | C18.2 22.86,21.42 v22.86,21.34 | v22.86,21.34 22.86,21.25 C9.2 24.98,19.13 24.98,18.54 | C17.2 29.46,21.42 29.46,21.34 | 29.46,21.34 29.46,21.25 C19.2 29.04,19.81 R15.1 | S3.5 v32.77,20.83 | S3.1 33.06,21.12 v32.77,20.83 | S3.4 33.06,20.54 v32.77,20.83 | D6.C 14.86,1.4 14.99,1.52 | 14.99,1.52 15.11,1.4 D7.C 18.67,1.4 18.8,1.52 | 18.8,1.52 18.92,1.4 D8.C 21.97,1.4 | 21.97,1.4 22.1,1.52 v22.1,2.28 | LED1.4 22.91,1.4 21.97,1.4 | 24.98,18.54 C14.2 C15.2 | U2.1 15.23,10.91 v15.24,10.92 | U2.1 14.22,10.37 v14.22,10.41 | U2.1 15.2,9.4 v14.22,9.4 | U2.1 15.21,9.37 v14.22,8.38 | S4.3 33.4,14.09 33.5,13.99 v33.5,13.97 | C3.2 31.41,28.6 v32.26,27.75 | C7.1 25.17,25.82 v24.89,25.54 | C6.1 15.33,25.82 v15.75,25.4 | U11.9 v17.53,30.23 | SW1.5 v4.32,16.76 | J2.S2 3.75,61.66 v3.81,61.72 | J2.6 3.29,69.61 v3.56,69.34 | J2.S1 2.27,72.9 3.56,72.9 3.56,73.41 | v9.65,72.14 9.76,72.24 J2.S3 9.76,73.72 R19.1 | C4.2 21.82,77.22 | 21.82,77.22 21.84,77.22 | 21.84,77.22 R12.1 | 21.82,77.22 v21.82,76.15 | C5.2 21.84,78.74 | 21.84,78.74 21.84,77.22 | C8.2 21.68,78.74 21.84,78.74 | U6.P$3 4.32,78.33 v4.32,76.71 3.39,75.78 C10.2 3.56,75.02 3.56,73.41 | S1.1 24.85,100.11 v25.15,99.82 | v25.15,99.82 S1.5 | S1.4 27.16,100.08 25.4,100.08 v25.15,99.82 | X1.2 v15.49,99.31 | X1.1 v20.57,99.31 | S2.1 10.63,100.11 v10.92,99.82 | S2.5 v10.92,99.82 | S2.4 12.93,100.08 11.18,100.08 v10.92,99.82 | J1.S4 28.53,93.83 J1.B1_A12 28.53,94.4 28.36,94.58 C1.2 R8.1 R17.2 | J1.A1_B12 28.53,86.34 J1.S1 26.92,85.76 C2.2 | C2.2 R7.1 | 18.8,1.52 v18.8,2.28 | 14.99,1.52 v14.99,2.28 | C25.2 6.44,52.92 v6.35,52.83
  Top 0.254: U7.4 2.67,55.24 v3.05,54.86 | C11.2 11.34,60.38 J2.S4 8.73,61.31 v8.64,61.21 | U6.P$8 12.09,80.11 v11.94,80.26 | U6.P$19 3.09,91.74 v3.05,91.69 | U6.P$12 13.59,91.82 v13.72,91.69 | 3.56,73.41 v3.73,73.24 | C23.2 22.02,50.53 v21.82,50.53 21.67,50.53 C16.2 20.23,50.3 U4.2 U4.3 | C23.2 22.86,48.09 C20.2 | U1.3 24.59,50.25 24.33,50.25 23.78,49.7 C23.2 | C24.2 27.52,47.84 v26.67,46.99 | U9.40 33.78,55.79 33.78,56.62 v33.5,56.9 | C2.2 26.67,84.84 v27.18,84.33 27.18,83.57 26.67,83.06 U5.2 | R5.2 20.83,84.42 v20.83,85.09 | C27.2 7.62,40.08 v6.88,39.34 | U8.2 11.43,37.52 | 11.43,37.52 12.29,37.52 C21.2 | 11.43,37.52 11.43,36.94 v11.54,36.83 | C28.2 v7.62,32.26 | R27.1 v9.65,32.26 | C12.2 C13.2 21.01,18.56 23.95,18.56 23.96,18.54 24.98,18.54 | U3.2 11.92,47.94 C22.2 13.07,47.41 v13.59,46.89 | C26.2 7.28,45.47 v6.5,45.47 | 29.46,21.34 v30.8,21.34
  Top 0.635: 24.94,67.06 U9.41_7 | 24.94,67.06 U9.41_8 | U9.41_8 U9.41_9 | U9.41_9 U9.41_6 | U9.41_6 U9.41_5 | U9.41_5 U9.41_4 26.24,67.06 24.94,67.06 | U9.41_7 U9.41_1 | U9.41_1 U9.41_2 | U9.41_3 U9.41_2 | U9.41_3 U9.41_6 | U9.41_5 U9.41_2 | U9.41_5 U9.41_8 | U9.41_7 23.91,68.2 v23.32,68.2 | U9.41_1 27.89,67.31 v28.98,67.31 | U9.41_3 28.8,64.36 v28.93,64.24 | U9.41_9 23.98,64.36 v23.88,64.26 | U9.1 33.71,72.66 33.71,71.73 v33.5,71.52 | v30.73,79.79 29.77,80.76 J3.1
  GNDPlane 0.254: v25.15,99.82 25.15,100.33 25.4,100.58 25.65,100.33
  Bottom 0.635: v23.32,68.2 23.32,66.6 TP14.P$1
  pour GNDPlane: -2.2,-5.25 38.52,-5.25 38.52,108.62 -2.2,108.62
GPS_FIX  (via drill 0.35)
  Top 0.254: U6.P$5 7.59,76.74 v7.62,76.71 | v16.76,6.86 R20.2
  Bottom 0.254: v16.76,6.86 1.27,6.86 1.22,6.91 1.22,69.8 7.69,76.27 7.69,76.64 v7.62,76.71
MISO  (via drill 0.35)
  Top 0.254: U7.6 9.69,56.91 v10.41,56.91 11.29,56.91 RN1.6 | U9.12 20.07,72.98 v20.07,71.63 | v3.56,70.61 2.13,70.61 J2.7
  Bottom 0.254: v20.07,71.63 20.07,70.62 TP11.P$1 4.06,70.11 | 4.06,70.11 v3.56,70.61 | v10.41,56.91 10.41,65.28 10.16,65.53 3.56,65.53 3.56,68.07 4.83,69.34 4.06,70.11
MOSI  (via drill 0.35)
  Top 0.254: U7.5 9.98,55.94 10.01,55.94 10.06,55.99 10.67,55.99 | 10.67,55.99 RN1.7 | U9.17 17.65,68.71 v17.78,68.58 | J2.3 2.05,66.29 v4.3,66.29 v4.31,66.29 | 10.67,55.99 10.67,55.5 v10.54,55.37
  Bottom 0.254: TP9.P$1 17.91,68.45 v17.78,68.58 4.91,68.58 4.32,67.99 v4.32,66.29 | v10.54,55.37 11.18,55.37 11.18,65.53 10.56,66.14 4.81,66.14 4.66,66.29 v4.32,66.29 | v4.31,66.29 v4.32,66.29
N$1
  Top 0.254: S4.2 29.76,13.55 Q2.1 29.14,15.39 R16.1
N$2
  Top 0.254: D7.A R20.1
N$3
  Top 0.254: R14.2 D8.A
N$4
  Top 0.254: R3.1 R1.1 31.46,24.59 S3.2 S3.3
N$5
  Top 0.254: R2.1 27.85,7.28 27.18,6.6 24.96,6.6 | LED1.2 25.73,4.88 25.13,4.88 24.96,5.04 24.96,6.6 | 24.96,6.6 Q3.3
N$6
  Top 0.254: U2.3 20.72,10.27 28.04,10.27 28.19,10.41 Q2.3
N$7
  Top 0.178: C20.1 24.64,48.17 U1.4
N$8
  Top 0.254: R9.2 22.77,7 22.77,5.99 22.93,5.83 24.56,5.83 24.56,4.87 24.96,4.47 25.5,4.47 26.16,3.81 26.16,3.13 26.16,3.12 26.16,1.78 26.79,1.78 LED1.1
N$10
  Top 0.254: X1.3 18.03,97.42 15.09,94.48 U6.P$11
N$11
  Top 0.254: SW1.8 12.7,21.84 13.21,21.34 13.21,11.43 11.18,9.4 R6.1
N$12
  Top 0.178: R26.1 16.2,49.7 16.52,49.38 17.23,49.38 17.48,49.64 U4.12
N$13
  Top 0.254: D4.3 23.2,11.26 Q1.3 27.24,12.85 Q2.2 27.34,13.65 R16.2
N$14
  Top 0.254: SW1.7 12.45,19.3 12.7,19.05 12.7,11.68 12.45,11.43 R23.1
N$15
  Top 0.178: U1.10 26.26,51.4 R25.1
N$16  (via drill 0.35)
  Top 0.254: U10.2 21.08,20.57 20.91,20.4 Q4.3 16.34,20.4 v16.26,20.32 | R24.1 7.79,14.14 v8.38,14.73
  Bottom 0.254: v8.38,14.73 13.97,20.32 v16.26,20.32
N$20
  Top 0.254: R4.2 D5.A
N$21  (via drill 0.35)
  Top 0.254: U5.1 26.86,82.11 v26.92,82.04 | v10.92,1.47 9.22,1.47 D5.C
  Bottom 0.254: v10.92,1.47 11.17,1.22 28.62,1.22 29.06,1.66 29.06,5.06 30.72,6.73 33.08,6.73 33.46,6.35 33.72,6.35 34.57,7.2 34.57,81.07 33.95,81.69 27.28,81.69 v26.92,82.04
N$22
  Top 0.254: U5.5 21.44,82.11 R5.1
N$24
  Top 0.254: R21.2 D6.A
NEO_DATA  (via drill 0.35)
  Top 0.254: U9.35 28.25,56.05 28.25,56.38 28.77,56.9 v29.08,56.9 | R9.1 22.25,9.49 v23.11,8.63
  Bottom 0.254: v23.11,8.63 23.22,8.74 28.81,8.74 29.33,9.26 29.33,56.65 v29.08,56.9
OSC1
  Top 0.254: U11.8 15.46,31.24 13.97,31.24 13.97,28.03 C6.2 16.72,27.52 Y1.1
OSC2
  Top 0.254: U11.7 16.72,32.77 22.81,26.67 Y1.2 23.92,27.52 C7.2
SCK  (via drill 0.35)
  Top 0.254: U7.3 2.67,56.52 4.57,54.61 10.41,54.61 | 10.41,54.61 10.84,54.61 RN1.8 | U9.18 17.4,67.44 v17.78,67.06 | 10.41,54.61 10.66,54.36 v10.66,54.1 | J2.5 3.98,68.51 4.78,67.71 v5.18,67.71
  Bottom 0.254: TP10.P$1 19.3,67.06 v17.78,67.06 17.53,67.31 11.94,67.31 | v10.66,54.1 10.73,54.1 11.94,55.3 11.94,67.31 | v5.18,67.71 5.58,67.31 11.94,67.31
SCL  (via drill 0.35)
  Top 0.178: R18.1 18.03,48.43 U4.13
  Top 0.254: v24.13,52.07 24.64,51.56 U1.1 | U9.24 16.43,59.94 v17.78,59.94 | R18.1 17.61,46.83 v17.38,46.59
  Bottom 0.254: v17.38,46.59 17.59,46.81 17.59,50.82 17.78,51.01 v17.78,59.94 17.78,61.47 18.42,62.1 TP8.P$1 20.07,62.1 20.69,61.48 23.66,61.48 26.67,58.47 26.67,52.07 v24.13,52.07
SD_CD
  Top 0.254: R19.2 10.25,75.44 11.18,75.44 11.18,73.02 J2.SW-B 11.47,73.15 16.26,73.15 16.26,71.3 U9.15
SD_CS
  Top 0.254: U9.23 14.86,61.09 13.97,61.98 13.97,62.74 13.12,63.58 6.85,63.58 5.23,65.21 | 5.23,65.21 J2.2 | TP12.P$1 5.84,65.83 5.23,65.21
SDA  (via drill 0.35)
  Top 0.178: R22.1 18.96,48.09 18.53,48.52 U4.14
  Top 0.254: U1.11 v25.65,52.73 | U9.25 18.67,58.55 v18.8,58.67 | R22.1 18.96,48.75 19.2,48.99 v19.2,49.09
  Bottom 0.254: v25.65,52.73 25.65,58.41 23.6,60.46 19.57,60.46 TP7.P$1 19.3,60.45 18.8,59.94 v18.8,58.67 18.8,58.64 18.91,58.53 18.91,49.67 19.2,49.38 v19.2,49.09
USB_DN  (via drill 0.35)
  Top 0.254: v18.8,74.42 18.8,73.04 U9.13 18.86,72.98 18.86,71.91 20.15,70.61 v30.48,70.61 | 29.39,89.92 29.39,89.56 29.22,89.4 28.6,89.4 J1.B7 | 29.39,89.92 29.39,90.1 29.22,90.26 28.6,90.26 J1.A7 | 29.39,89.92 v29.97,89.92
  Bottom 0.254: v29.97,89.92 29.72,89.66 23.81,89.66 18.95,84.8 18.95,74.57 v18.8,74.42 | P3.3 31.26,49.51 30.99,49.78 30.99,70.1 v30.48,70.61
USB_DP  (via drill 0.35)
  Top 0.254: v17.53,74.42 17.55,74.39 U9.14 18.09,72.47 18.09,72.09 20.34,69.85 v29.46,69.85 | 27.68,90.42 27.68,90.06 27.89,89.85 28.51,89.85 J1.A6 | 27.68,90.42 27.68,90.6 27.84,90.76 28.46,90.76 J1.B6 | 27.68,90.42 v26.92,90.42
  Bottom 0.254: v26.92,90.42 23.88,90.42 18.54,85.09 18.54,75.44 v17.53,74.42 | P3.2 32.24,47.5 30.58,49.16 30.58,68.73 v29.46,69.85
USB_MON  (via drill 0.35)
  Top 0.254: R17.1 R11.2 21.76,86.36 v21.59,86.36 | v23.88,74.42 23.9,74.39 U9.9
  Bottom 0.254: v23.88,74.42 19.81,74.42 19.36,74.88 19.36,84.55 21.17,86.36 v21.59,86.36
V_BATT  (via drill 0.35)
  Top 0.254: Q3.2 25.95,8.4 Q1.2 28.87,9.06 v30.48,10.67 | 24.68,79.8 R10.2 C5.1 21.26,80.61 20.43,81.44 8.53,81.44 6.81,79.72 6.81,79.33 U6.P$4 | 24.68,79.8 25.15,79.34 25.15,78.99 25.38,78.76 J3.2 27.69,78.65 v27.69,76.96 | U5.3 25.29,83.61 24.97,83.61 24.68,83.33 24.68,79.8
  Bottom 0.254: v27.69,76.96 27.69,74.68 31.5,70.87 31.5,52.83 31.87,52.45 32.65,52.45 33.76,51.34 33.76,46.48 30.48,46.48 30.23,46.23 30.23,21.69 30.14,21.61 30.14,11.01 v30.48,10.67
V_USB  (via drill 0.35)
  Top 0.254: U10.3 20.13,22.42 TP27.P$1 26.16,23.37 | C18.1 26.16,22.35 | 26.16,22.35 C17.1 | 26.16,23.37 26.16,22.35 | 26.16,22.35 26.16,20.32 | 26.16,20.32 C19.1 27.34,19.81 R15.2 26.16,17.53 26.16,13.97 25.74,13.55 25.02,13.55 | 26.16,20.32 C9.1 | P3.1 31.32,44.57 31.32,35.79 P4.1 30.58,33.17 30.58,23.37 26.16,23.37 | Q1.1 24.37,9.4 v23.62,9.4 | C1.1 27.06,92.48 J1.B4_A9 29.95,92.48 30.73,91.69 30.73,88.39 30.23,87.88 28.74,87.88 J1.A4_B9 28.48,87.63 27.09,87.63 C2.1 26.67,86.36 22.61,86.36 R11.1 22.61,84.49 U5.4 v24.02,83.07 v24.02,83.06 | R4.1 10.58,5.68 v10.67,5.59 | 25.02,13.55 v25.02,12.49 | D4.1 25.02,13.55
  Bottom 0.254: v10.67,5.59 11.68,4.57 11.68,1.78 11.84,1.63 28.45,1.63 28.65,1.83 28.65,5.23 30.56,7.14 33.93,7.14 34.16,7.37 34.16,34.8 | 34.16,34.8 34.11,34.85 P4.1 | 34.16,34.8 34.16,45.34 | 34.16,45.34 33.99,45.51 P3.1 | v24.02,83.06 24.38,83.06 26.16,81.28 33.78,81.28 34.16,80.9 34.16,45.34 | v23.62,9.4 23.62,11.09 v25.02,12.49
VIN
  Top 0.178: P1.1 7.33,51.51 C25.1
  Top 0.254: C26.1 C27.1 7.62,43.27 5.84,43.27 3.42,40.85 P2.1 1.57,40.85 1.52,40.89 | P1.1 1.73,51.51 1.52,51.31 1.52,40.89 | 1.52,40.89 1.52,35.81 6.95,35.81 C28.1 7.62,34.89 8.65,33.85 8.65,31.37 13.69,26.33 13.69,19.3 17.38,19.3 Q4.2
XTSD_CS
  Top 0.254: U7.2 2.27,58.36 10.01,58.36 10.44,57.94 10.78,57.59 RN1.5 12.01,57.59 12.19,57.4 TP18.P$1 12.6,53.59 16.15,57.15 16.18,57.15 U9.26

## Text on the board
tSilk: GND | V+ | GND | L | - | H | + | X | Z | V- | 5V | Thetis / Rev G1 / 08/2022 / Braidan Duffy | Y | GND | V+ | L | RX | H | TX | V- | 5V